# Altium PCB MARAL_LLC_V1.PcbDoc
Units mil, origin at the board's own origin, x right, y up, seen from the top; angles counter-clockwise.
Board outline 3780.71 x 2796.3 mil, 2 copper layers (Top Layer, Bottom Layer), stack 61.756 mil thick; 84 components, 54 nets, 207 pads, 12 vias.
Unrouted connection lines stored in the file: 4.
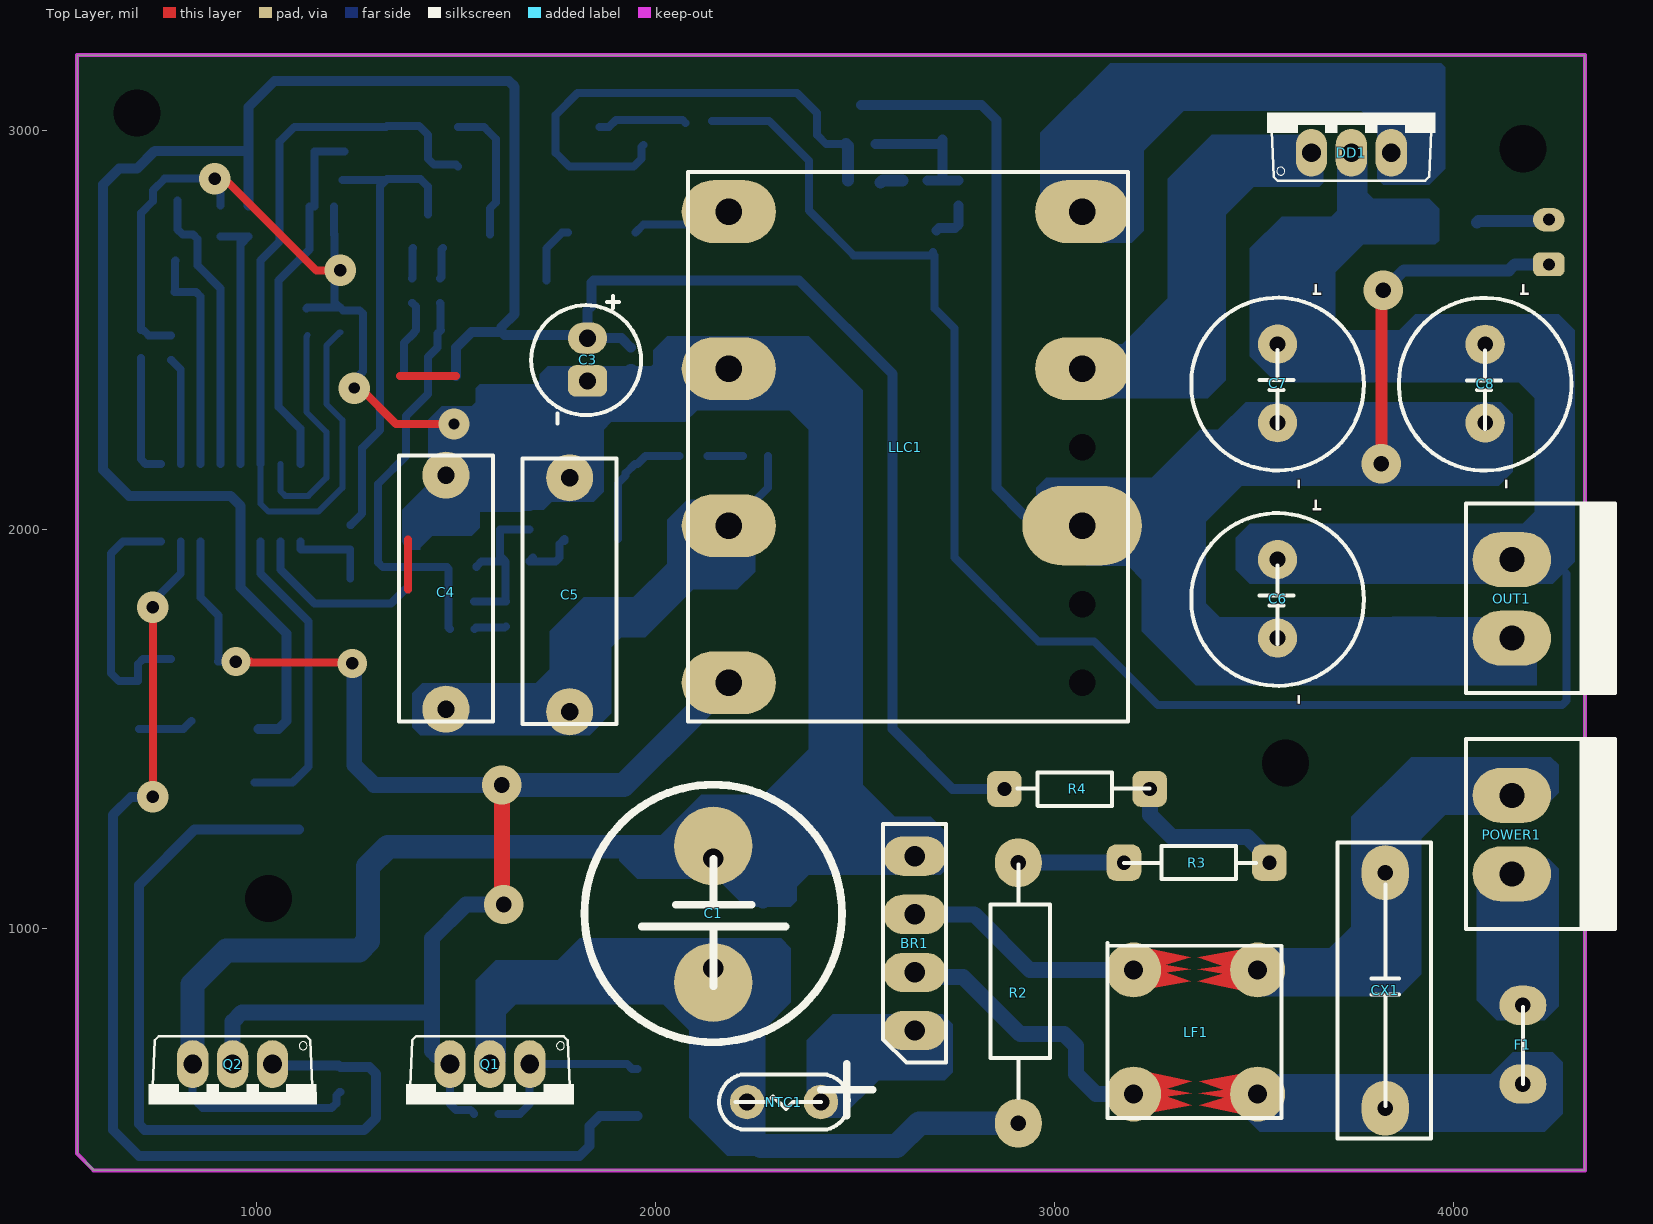
[diagram p0: Top Layer view]
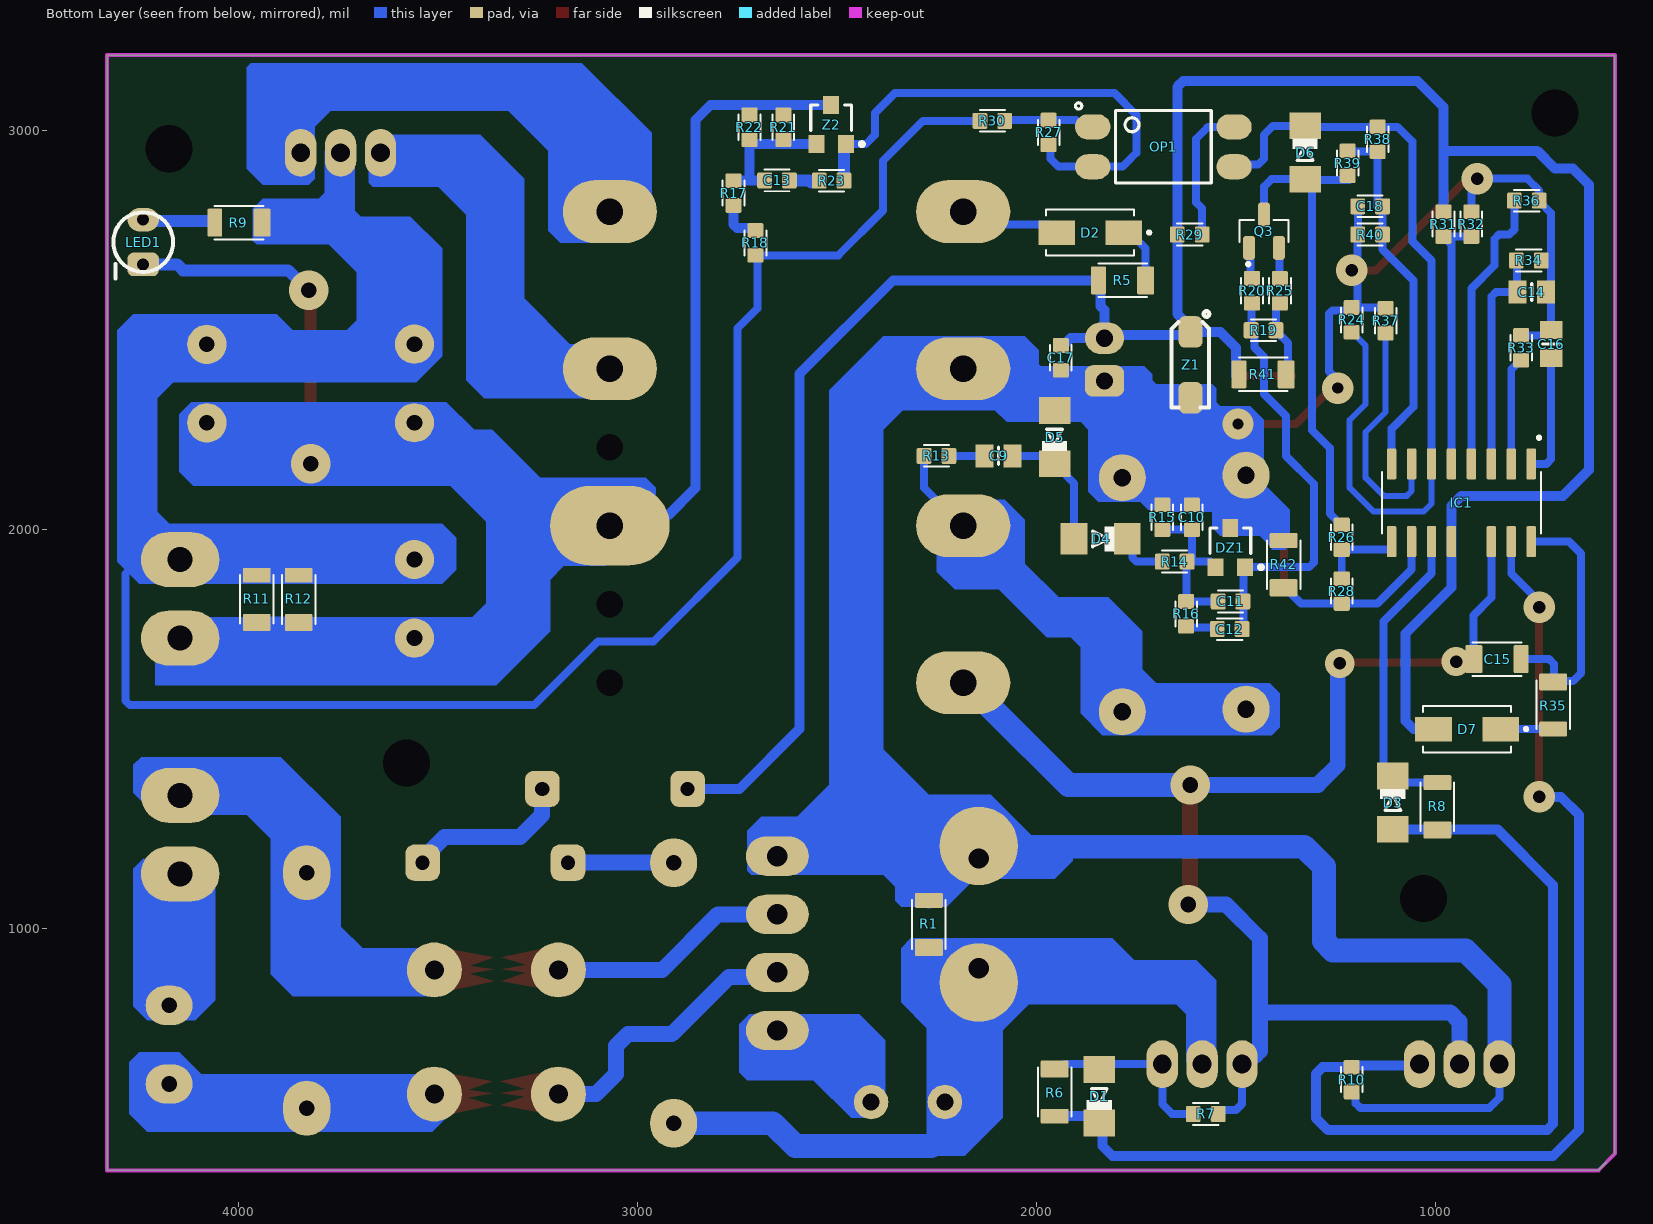
[diagram p1: Bottom Layer view, seen from below]
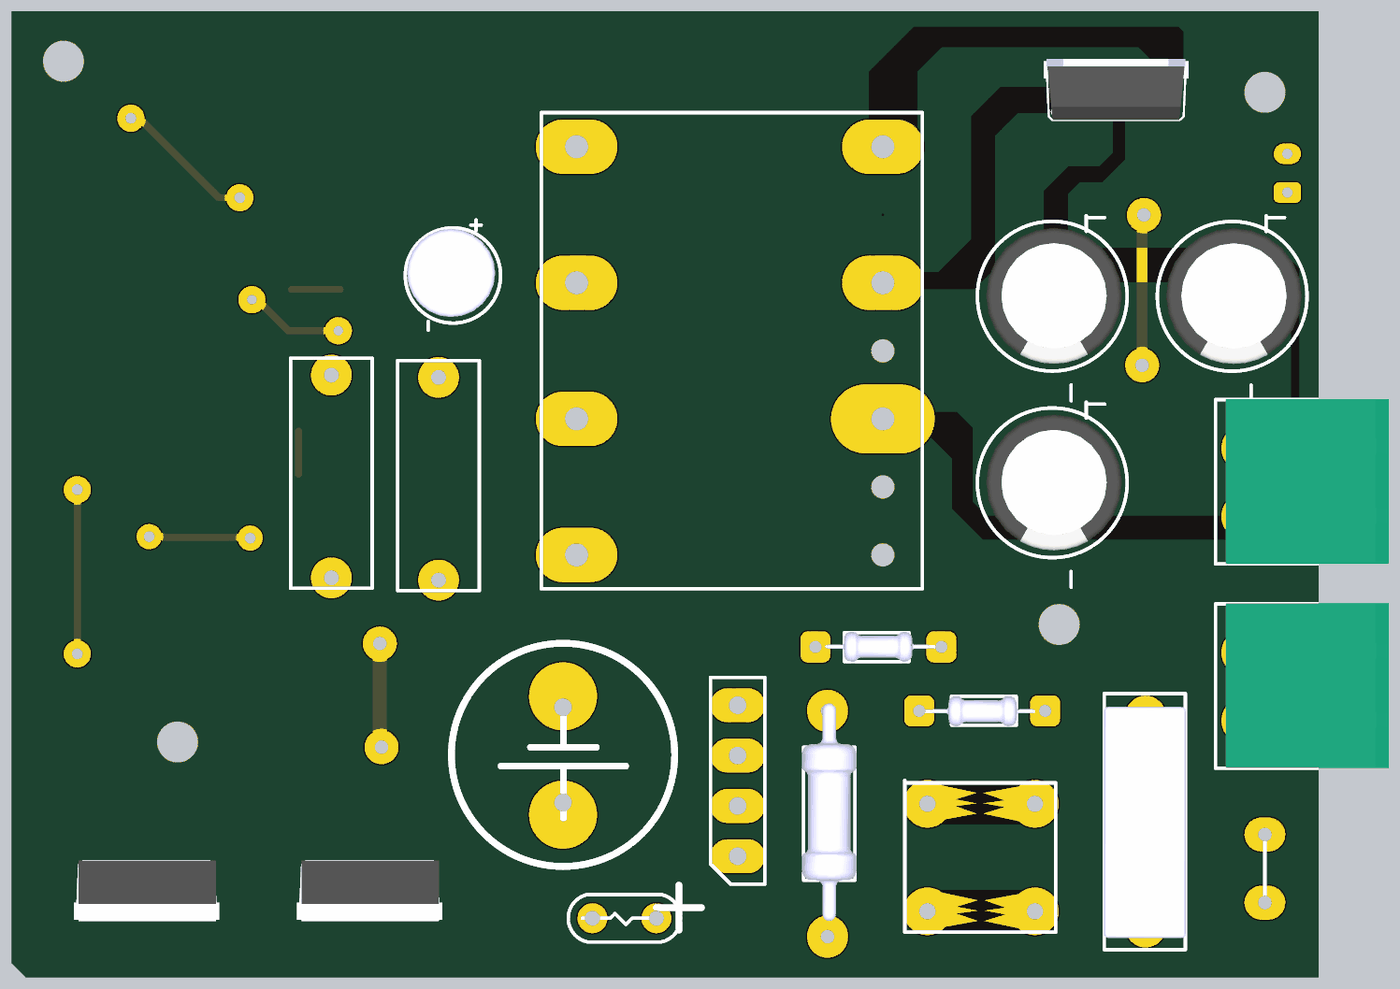
[diagram p2: 3D render of the assembled board from above, using the file's embedded part models]
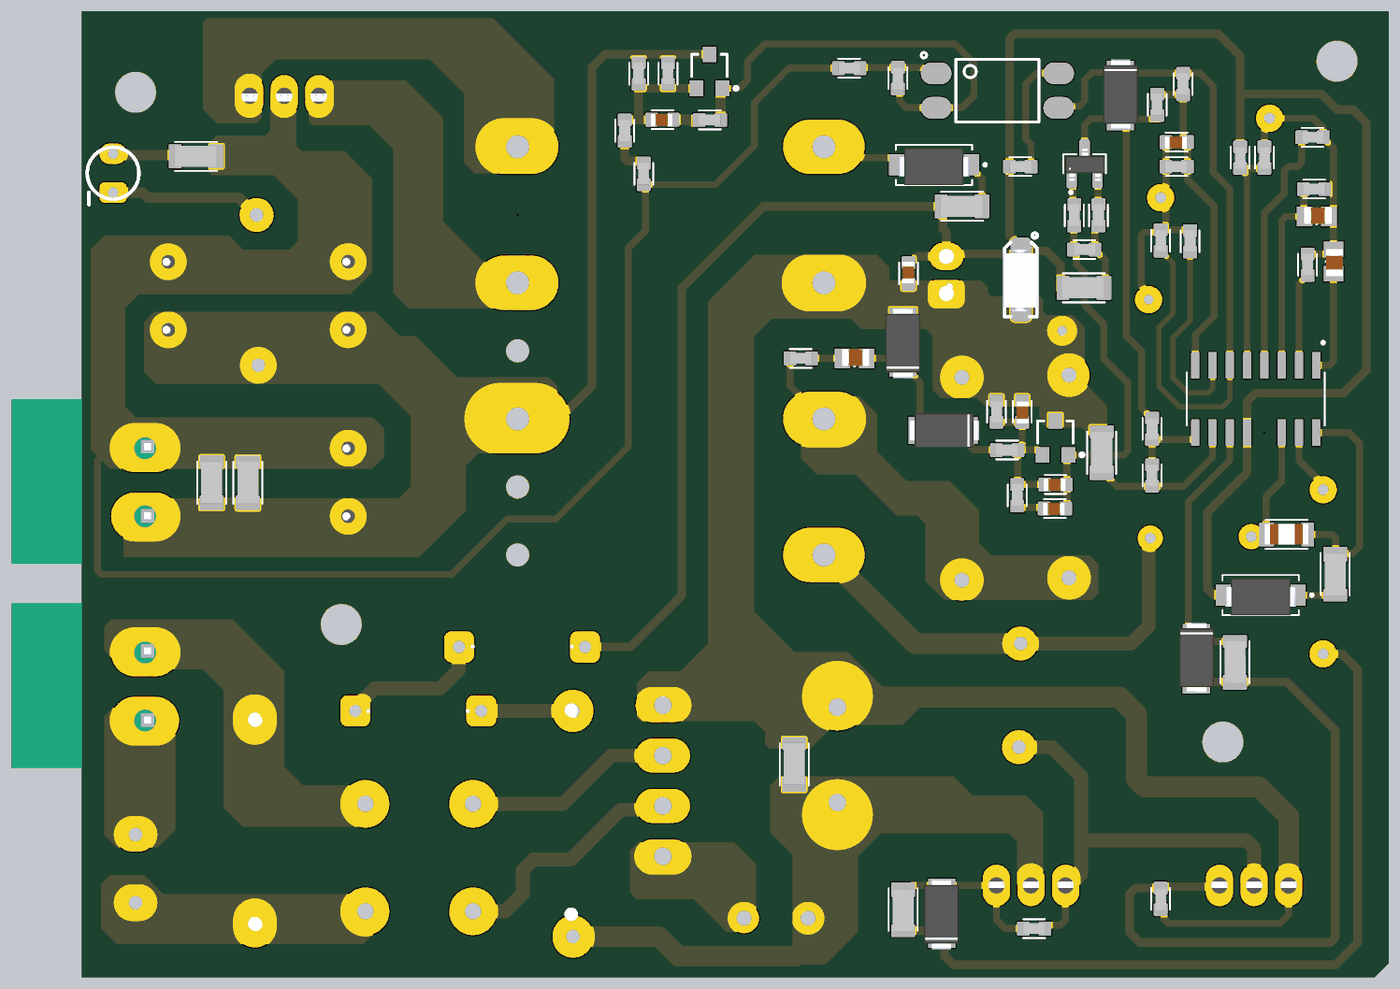
[diagram p3: 3D render of the assembled board from below, using the file's embedded part models]

## Layer stack, top to bottom
Top Solder: solder mask 1, SM-001, Dk 4
Top Layer: signal copper 1.378
Dielectric 1: core 59, Core-043, Dk 4.3
Bottom Layer: signal copper 1.378
Bottom Solder: solder mask 1, SM-001, Dk 4

## Board outline
550,435.55 550,3190 4330.71,3190 4330.71,393.7 591.85,393.7

## Design rules (kind name [scope] priority, off if disabled: settings)
Clearance [All] p1: gap=15 ignorepadtopadclearanceinfootprint=FALSE
ComponentClearance [All] p1: gap=0 collisioncheckmode=3 verticalgap=0 showdistances=FALSE
PolygonConnect [All] p1: connectstyle=Relief reliefconductorwidth=10 reliefentries=4 polygonreliefangle="90 Angle" airgapwidth=10
RoutingVias [All] p1: holewidth=28 width=50 viastyle="Through Hole" minholewidth=28 minwidth=50 maxholewidth=28 maxwidth=50
SolderMaskExpansion [All] p1: expansion=4 istentingtop=FALSE
Width [All] p1: maxlimit=196.85 minlimit=10 preferedwidth=10 minimp=50.000000 maximp=50.000000 favimp=50.000000
29 further rules are at their usual default settings.

## Classes and differential pairs
net class PP300V: +310 AC_L AC_N GND NetBR1_+ NetBR1_F NetBR1_N NetCX1_2
component class U_LLC: C3 C4 C5 C6 C7 C8 C9 C10 C11 C12 C13 C14 C15 C16 C17 C18 D1 D2 D3 D4 D5 D6 D7 DD1 DZ1 IC1 LED1 LLC1 OP1 Q1 Q2 Q3 R2 R3 R4 R5 R6 R7 R8 R9 R10 R11 R12 R13 R14 R15 R16 R17 R18 R19 R20 R21 R22 R23 R24 R25 R26 R27 R28 R29 R30 R31 R32 R33 R34 R35 R36 R37 R38 R39 R40 Z1 Z2
component class U_EMI_HV_Protect: BR1 C1 CX1 F1 LF1 NTC1 R1
component class Multi: OUT1 POWER1

## Components (designator, comment, footprint, x,y, rotation, side; value= is the part's Value field where it differs from the comment)
BR1 "KBL410" KBP206 2650,744.33 r90 top
C1 "100uF-400V" CAP-EL-P7MM 2145,1175.59 r270 top locked
C3 "100uF-25V" cap/330u/16v 1830,2372.93 r90 top
C4 "22nF/630V - MKT" CAP-POLY-0.47uF-400V 1475,2136.61 r270 top locked
C5 "22nF/630V - MKT" CAP-POLY-0.47uF-400V 1785,2130 r270 top locked
C6 "1000uF/35V" CAP-EL_P5MM 3559.61,1925.39 r270 top
C7 "1000uF/35V" CAP-EL_P5MM 3559.61,2465.39 r270 top
C8 "1000uF/35V" CAP-EL_P5MM 4080,2465 r270 top
C9 "220pF" CAP-0805 2059.01,2184.15 r0 bottom
C10 "10nF" CAP-0603 1610,2027.05 r270 bottom
C11 "68nF" CAP-0603 1517.95,1819.33 r0 bottom
C12 "NU" CAP-0603 1520,1750 r0 bottom
C13 "22nF" CAP-0603 2655,2875 r0 bottom
C14 "4.7uF" CAP-0805 722.16,2595 r0 bottom
C15 "100nF" CAP-1206 845,1670 r180 bottom
C16 "1uF" CAP-0805 710.85,2429.01 r90 bottom
C17 "100nF" CAP-0603 1940,2435 r90 bottom
C18 "2.2nF" CAP-0603 1167.8,2810 r0 bottom
CX1 "0.1uF/275V" CAP/0.22uF/275v/mkt 3830,1140 r270 top
D1 "4148" mini_melf 1845,585 r90 bottom
D2 "US1M" DIOD/1N4007/SMD 1780.75,2745 r0 bottom
D3 "4148" mini_melf 1105,1310 r270 bottom
D4 "4148" mini_melf 1845,1975 r0 bottom
D5 "4148" mini_melf 1956.92,2237.55 r90 bottom
D6 "4148" mini_melf 1325,2940 r270 bottom
D7 "DIOD/RECTIFIERS" DIOD/1N4007/SMD 835.75,1500 r0 bottom
DD1 "MBR10150" TO220AB 3745,2945 r0 top
DZ1 "TL431" TL431 1550,1905 r180 bottom
F1 "3A" FUZE_GLASS_ISTADE 4175,806.85 r270 top
IC1 "NCP1396" TL494_SMD 949.98,2060.77 r270 bottom
LED1 "LED-1COLER" led/3MM/DIP 4240,2665 r90 bottom
LF1 "" emi_chok_yd 3510,585 r180 top
LLC1 "EE33" EE33 2184.17,2797.4 r90 top locked
NTC1 "5D7" NTC_XD_7 2415,565 r180 top
OP1 "pc817" pc817 1674.32,2954.52 r180 bottom
OUT1 "CONECTOR/FONIX/2PIN" CONECTOR/FONIX/2PIN 4150,1731.03 r90 top
POWER1 "CONECTOR/FONIX/2PIN" CONECTOR/FONIX/2PIN 4150,1140 r90 top
Q1 "SVF12N650" TO-220 1584.96,659.96 r180 top
Q2 "SVF12N650" TO-220 939.96,659.96 r180 top
Q3 "" SOT23 1467.4,2706.3 r270 bottom
R1 "1M" RES/1206 2265,1010 r90 bottom
R2 "33K" RES/1W 2910,1165 r270 top
R3 "33K" RES/0.25W 3539.48,1165 r180 top
R4 "33K" RES/0.25W 2875,1350 r0 top
R5 "10R" RES/1206 1784.51,2630.14 r0 bottom
R6 "10R" RES/1206 1960,590 r270 bottom
R7 "10K" RES/0603 1580,535 r0 bottom
R8 "33R" RES/1206 990,1305.29 r90 bottom
R9 "10K" RES/1206 4000,2775 r0 bottom
R10 "10K" RES/0603 1210,625 r90 bottom
R11 "2.2K" RES/1206 3950,1825.29 r90 bottom
R12 "2.2K" RES/1206 3845,1825 r90 bottom
R13 "680R" RES/0603 2255,2185 r0 bottom
R14 "100K" RES/0603 1650,1920 r180 bottom
R15 "5.1K" RES/0603 1685,2035 r90 bottom
R16 "NU" RES/0603 1625,1785 r270 bottom
R17 "220" RES/0603 2760,2840 r270 bottom
R18 "18K" RES/0603 2705,2715 r270 bottom
R19 "1K" RES/0603 1435,2500 r0 bottom
R20 "10K" RES/0603 1460,2595 r270 bottom
R21 "2.2K" RES/0603 2635,3005 r270 bottom
R22 "39K" RES/0603 2720,3005 r270 bottom
R23 "1K" RES/0603 2510,2875 r180 bottom
R24 "2.2K" RES/0603 1210,2530 r90 bottom
R25 "512R" RES/0603 1390,2595 r270 bottom
R26 "10K" RES/0603 1235,1985 r90 bottom
R27 "10K" RES/0603 1970,3000 r90 bottom
R28 "6.2K" RES/0603 1235,1842.2 r270 bottom
R29 "100R" RES/0603 1620,2740 r0 bottom
R30 "1.5K" RES/0603 2115,3025 r0 bottom
R31 "10K" RES/0603 980,2770 r90 bottom
R32 "2.2K" RES/0603 910,2770 r90 bottom
R33 "3.9K" RES/0603 785,2452.2 r270 bottom
R34 "150K" RES/0603 770,2675 r0 bottom
R35 "10R" RES/1206 710.14,1560.49 r270 bottom
R36 "10K" RES/0603 775,2825 r0 bottom
R37 "10K" RES/0603 1125,2520 r270 bottom
R38 "50R" RES/0603 1145,2975 r270 bottom
R39 "0R/NU" RES/0603 1220,2915 r270 bottom
R40 "1.5K" RES/0603 1160,2740 r180 bottom
R41 "0R" RES/1206 1432.18,2394.42 r0 bottom (schematic designator R5)
R42 "0R" RES/1206 1375.58,1912.18 r90 bottom (schematic designator R5)
Z1 "18V" DIOD/RS1J 1610,2410 r270 bottom
Z2 "TL431" TL431 2550.51,2965.76 r180 bottom

## Footprints (in the part's own frame and the unit in brackets; to place one, negate y for a bottom-side part, rotate by r counter-clockwise, add the part's x,y. Pads: shape width x height; smd on the part's side, far side on the other; paste and mask are expansions set on the pad)
CAP-0603 [mm]
  rrect20% 0.94x1.02 smd: 1(-0.893,-0.017) 2(0.687,-0.017)
  silkscreen extent -0.9,-0.71 0.7,0.67, body extent -0.84,-0.44 0.76,0.46, height 0.77
CAP-0805 [mm]
  rect 1.15x1.45 smd: 1(0.025,-0.022) 2(1.825,-0.022)
  silkscreen extent 0.93,-0.57 0.93,0.53, body extent -0.17,-0.71 1.84,0.54, height 0.94
CAP-1206 [mm]
  rrect14% 1.09x1.77 smd: 1(-1.488,0.139)
  rrect14% 0.94x1.77 smd: 2(1.517,0.139)
  silkscreen extent -1.57,-0.93 1.53,1.2, body extent -1.63,-0.6 1.57,0.9, height 1.6
CAP-EL-P7MM [mm]
  round 5 hole 1.3 copper offset 0.9,0: +(7,0)
  round 5 hole 1.3 copper offset -0.8,0: -(0,0)
  silkscreen extent -4.7,-8.2 16.38,10.16
CAP-EL_P5MM [mm]
  round 2.5 hole 1: +(0.01,0.01) -(5.01,0.01)
  silkscreen extent -2.95,-5.49 8.05,5.51, body extent -2.48,-4.86 7.52,5.14, height 16
CAP-POLY-0.47uF-400V [mm]
  round 3 hole 1.1: 1(0,0) 2(14.9,0)
  silkscreen extent -1.24,-3 15.67,3
CAP/0.22uF/275v/mkt [mm]
  oval 3.5x3 hole 1: 1(0,0) 2(15,0)
  silkscreen extent -1.91,-3.05 16.91,2.92, body extent -0.94,-3.05 16.06,2.95, height 11.5
cap/330u/16v [mm]
  oval 2x2.5 hole 1.1: +(2.72,0)
  rrect50% 2x2.5 hole 1.1: -(0,0)
  silkscreen extent -2.7,-3.41 5.4,3.59, body extent -1.74,-3.02 4.76,3.48, height 11
CONECTOR/FONIX/2PIN [mm]
  oval 3.5x5 hole 1.6: 1(-0.073,0.063) 2(4.927,0.063)
  silkscreen extent -3.58,-6.5 8.5,3, body extent -3.54,-9.75 8.54,2.25, height 3
DIOD/1N4007/SMD [mm]
  rect 2.33x1.56 smd: A(4.299,0) K(0.019,0)
  silkscreen extent -1.7,-1.48 4.96,1.48, body extent -0.44,-1.24 4.76,1.49, height 2.6
DIOD/RS1J [mil]
  rrect50% 78.74x60 smd: A(79.25,-4.16) K(-85.75,-4.16)
  silkscreen extent -138,-52 104,43, body extent -91,-57 90,46, height 83
EE33 [mm]
  oval 4x6 hole 1.7: 1(0,0) 2(-10,0) 3(-20,0) 4(-30,0) 5(0,-22.5) 7(-10,-22.5)
  round 0 all layers, no hole: 6(-5,-22.5)
  round 0 hole 1.7: 8(-15,-22.5) 10(-25,-22.5) 11(-30,-22.5)
  oval 5.08x7.62 hole 1.7: 9(-20,-22.5)
  silkscreen extent -32.49,-25.41 2.51,2.59
emi_chok_yd [mm]
  round 3.5 hole 1.2: 1(0,0) 2(7.9,0) 3(0,-7.9) 4(7.9,-7.9)
  Top Layer region: 6.6,-8.366 6.6,-7.625 4.266,-7.938
  Top Layer region: 4.269,-8.707 6.568,-8.001 8.034,-9.506
  Top Layer region: 4.273,-7.183 7.969,-6.513 6.616,-7.995
  Top Layer region: 1.475,-7.521 1.475,-8.261 3.809,-7.948
  Top Layer region: 3.807,-7.179 1.508,-7.885 0.041,-6.381
  Top Layer region: 3.802,-8.703 0.106,-9.373 1.46,-7.892
  Top Layer region: 6.526,-0.477 6.526,0.264 4.191,-0.049
  Top Layer region: 4.194,-0.818 6.493,-0.112 7.959,-1.617
  Top Layer region: 4.199,0.706 7.894,1.376 6.541,-0.106
  Top Layer region: 1.4,0.369 1.4,-0.372 3.734,-0.059
  Top Layer region: 3.732,0.71 1.433,0.004 -0.034,1.509
  Top Layer region: 3.727,-0.814 0.031,-1.484 1.385,-0.002
  silkscreen extent -1.52,-9.62 9.57,1.53
FUZE_GLASS_ISTADE [mm]
  oval 2.5x3 hole 1: 1(-0.011,0) 2(5,0)
  silkscreen extent 0.1,0 5,0
KBP206 [mm]
  oval 2.5x4 hole 1.3: +(0,0) -(11.1,0) F(3.7,0) N(7.4,0)
  silkscreen extent -2.05,-2 13.15,2
led/3MM/DIP [mm]
  oval 1.5x2 hole 0.762: A(2.85,0)
  rrect50% 1.5x2 hole 0.762: K(0,0)
  silkscreen extent -0.89,-1.9 3.32,1.9
mini_melf [mm]
  rect 1.7x2 smd: A(1.557,-0.049) K(-1.843,-0.049)
  silkscreen extent -1.01,-0.84 0.36,0.74, body extent -2.79,-1.31 2.35,1.25, height 2.5
NTC_XD_7 [mm]
  round 2.2 hole 1.1: 1(0,0) 2(4.7,0)
  silkscreen extent -1.78,-1.74 6.48,1.74
pc817 [mm]
  oval 2.25x1.6 smd: 1(-4.699,1.409) 2(-4.699,-1.131) 3(4.301,-1.131) 4(4.301,1.409)
  silkscreen extent -5.8,-2.16 2.85,2.94
RES/0.25W [mm]
  rrect50% 2.2x2.3 hole 0.9: 1(0,0) 2(9.258,0)
  silkscreen extent 0.85,-1.07 9.26,1.05, body extent 0.81,-1.08 8.41,1.12, height 2.1
RES/1W [mm]
  oval 3.1x3 hole 1: 1(0,0) 2(16.591,0)
  silkscreen extent 0.11,-1.76 15,2.02, body extent -0.56,-1.87 15.44,2.13, height 5
RES/0603 [mm]
  rrect20% 0.94x1.02 smd: 1(-0.889,0) 2(0.691,0)
  silkscreen extent -0.9,-0.69 0.7,0.69, body extent -0.93,-0.41 0.67,0.39, height 0.43
RES/1206 [mm]
  rrect14% 1.09x1.77 smd: 1(-1.469,0.131)
  rrect14% 0.94x1.77 smd: 2(1.536,0.131)
  silkscreen extent -1.55,-0.93 1.55,1.2, body extent -1.51,-0.65 1.59,0.9, height 0.55
SOT23 [mil]
  rrect50% 60x30 smd: 1(-0.24,0) 2(-83.7,37.4) 3(-0.24,74.8)
  silkscreen extent -70,-24 45,99, body extent -86,-19 7,96, height 44
TL431 [mil]
  rect 40x45 smd: A(35.51,99.24) C(72.91,0.81) REF(-1.9,0.81)
  silkscreen extent -16,-4 117,99
TL494_SMD [mm]
  rrect25% 1.97x0.6 smd: 1(-2.644,4.826) 2(-2.644,3.556) 3(-2.644,2.286) 4(-2.644,1.016) 5(-2.644,-0.254) 6(-2.644,-1.524) 7(-2.644,-2.794) 8(-2.644,-4.064) 9(2.306,-4.064) 10(2.306,-2.794) 11(2.306,-1.524) 12(2.306,-0.254) 14(2.306,2.286) 15(2.306,3.556) 16(2.306,4.826)
  rrect25% 0x0 smd: 13(2.306,1.016)
  silkscreen extent -4.41,-4.68 1.78,5.45
TO220AB [mm]
  oval 2x3.048 hole 1.2: 1(-2.54,0) 2(0,0) 3(2.54,0)
  silkscreen extent -5.34,-1.78 5.33,2.54, body extent -5.12,-1.78 5.08,2.72, height 20.58
TO-220 [mm]
  oval 2x3.048 hole 1.2: 1(-2.541,-0.001) 2(-0.001,-0.001) 3(2.539,-0.001)
  silkscreen extent -5.35,-1.78 5.33,2.54, body extent -5.11,-1.83 4.99,2.62, height 19.84

## Part data
BR1: library part "BRIDGE RECTIFIERS"
C1 C3 C6 C7 C8: library part cap-electrolit
C4 C5: library part cap-poly
C9 C10 C11 C12 C13 C14 C15 C16 C17 C18: library part cap_smd
CX1: library part cap-mkt
D1 D2 D3 D4 D5 D6: library part DIOD/RECTIFIERS
DD1: library part DIOD_double
F1: library part fuze
LF1: library part emi_chok_yd
LLC1: library part TRANS_RT03_LLC
NTC1: library part NTC
Q1 Q2: library part MOSFET_N_CH
Q3: library part PNP
R1 R5 R6 R7 R8 R9 R10 R11 R12 R13 R14 R15 R16 R17 R18 R19 R20 R21 R22 R23 R24 R25 R26 R27 R28 R29 R30 R31 R32 R33 R34 R35 R36 R37 R38 R39 R40 R41 R42: library part RES/SMD
R2 R3 R4: library part RES/<1W
Z1: library part zener-0.5w

## Free pads (board coordinates)
  round 0 hole 118.11: 2(700,3045) 2(1030,1075) 2(3580,1415) 2(4175,2955)

## Via types
v1: diameter 98.43, hole 39.37, Top Layer to Bottom Layer, 4 vias
v2: diameter 78.74, hole 31.5, Top Layer to Bottom Layer, 4 vias
v3: diameter 78.74, hole 28, Top Layer to Bottom Layer, 2 vias
v4: diameter 72.83, hole 31.5, Top Layer to Bottom Layer, 2 vias

## Nets (pads, with @x,y where several pads share a name; then routed paths per layer and width w, separated by ;. In a path a pad name is that pad's centre, name@x,y a point inside that pad or via, vN(x,y) a via of type N, cw(c..) or ccw(c..) an arc to the next point about the centre after c; other vN are vias at no path point)
+24: C6.+ C7.+ C8.+ DD1.2 OUT1.2 R9.1 R11.2 R12.2 R18.2 R30.2 | length 6376.3
  Bottom Layer w20: R30.2 2285,3025 2385,2925 2385,2800 2497.2,2687.8 2694.92,2687.8 2696.5,2689.37 R18.2@2696.5,2696.3 ; R18.2@2700,2687.8 2700,2555 2750,2505 2750,1930 2960,1720 3100,1720 3260,1560 4273.28,1560 4285,1571.72 4285,1889.29 4264.29,1910 4162.52,1910 OUT1.2 ; 3745,2785.15 3760.29,2769.86 R9.1
  Bottom Layer w60: C6.+@3546.57,1923.43 4145.95,1923.43 OUT1.2 4156,1925 4191.94,1960.94 4191.94,1969.41 4255,2032.48 4255,2429.46 4219.85,2464.61 C8.+ 4080.2,2464.8 3560.2,2464.8 C7.+ 3560,2685 3625,2750 3709.85,2750 3745,2785.15 DD1.2@3745,2930
+310: C1.+ NTC1.2 Q1.2 R1.1 R2.2 | length 2126.2
  Bottom Layer w40: C1.+@2109.57,864.57 2140,895 C1.+ 2150.42,894.58 2241.44,894.58 2255.3,908.45 2255.3,950.72 2256.76,952.18 R1.1
  Bottom Layer w60: Q1.2 1585,810 1639.57,864.57 C1.+@2109.57,864.57 ; C1.+@2140,895 2140,588.43 2154.51,573.92 2221.04,573.92 NTC1.2 2225.53,560.57 2225.53,494.47 2265,455 2605,455 2661.81,511.81 R2.2
AC_L: F1.1 POWER1.1 | length 291
  Bottom Layer w60: POWER1.1 4147.53,878.48 4170,856 F1.1@4170,855.45
AC_N: CX1.1 LF1.3 POWER1.2 | length 989.2
  Bottom Layer w60: LF1.3 3791.02,896.02 3840,945 3840,1140 3841.12,1141.12 3841.12,1221.12 3965,1345 4136.49,1345 POWER1.2
FB: D6.K IC1.6 OP1.3 R24.1 R38.1 | length 2135.6
  Bottom Layer w15: IC1.6 1010,2065 1030,2045 1155,2045 1215,2105 1215,2275 1175,2315 1175,2461.57 R24.1@1208.43,2495 ; R24.1@1204.25,2489.25 R24.1
  Bottom Layer w20: IC1.6 1010,2675 1057.8,2722.8 1057.8,2972.8 1095,3010 R38.1 1324.37,3010 D6.K 1407.55,3012.55 1430,2990.1 1430,2930 1445,2915 1500,2915 OP1.3
GATE_H: D1.K IC1.15 R6.2 | length 2989.6
  Top Layer w20: v2(740,1330) v2(740,1805)
  Bottom Layer w20: v2(740,1805) 740,1820 810,1890 IC1.15
  Bottom Layer w25: v2(740,1330) 685,1330 640,1285 640,495 705,430 1810,430 1835,455 1835,504.37 D1.K 1860.15,529.51 R6.2
GATE_L: D3.K IC1.11 R8.2 | length 765.4
  Bottom Layer w20: R8.2 1090.14,1365.77 D3.K 1130,1405.63 1130,1770 1010,1890 IC1.11
GND: BR1.- C1.- C3.- C4.1 C5.1 C10.1 C14.1 C16.2 C17.1 C18.2 D5.A DZ1.A IC1.10 LLC1.2 Q2.3 R1.2 R10.1 R15.2 R24.2 R28.2 R32.2 R33.1 R34.1 R36.1 R37.1 R40.1 R42.1 R42.2 Z1.A | length 8690.8
  Top Layer w20: v2(895,2880) 920,2880 1150,2650 v2(1210,2650) ; v3(1245,2355) 1260,2355 1350,2265 v3(1495,2265) ; 1380,1850 1380,1975
  Bottom Layer w20: R33.1 729.57,2487.2 715.91,2500.87 C16.2 710,2793.43 740,2823.43 R36.1 740,2850.28 769.72,2880 v2(895,2880) 910,2865 R32.2@910,2812.2 ; Q2.3 840,575 855.03,559.97 865,550 1188.28,550 1200,561.72 1200,581.5 1208.5,590 R10.1 ; IC1.10 1060,1900 1145,1815 R28.2 1337.22,1815 1372.22,1850 R42.1@1380,1850 ; R37.1 1127.2,2557.2 R24.2@1208.43,2557.2 ; R40.1@1194.84,2740 C18.2 ; v2@1195,2650 1195,2570.63 R24.2@1208.43,2557.2 ; v2@1195,2673.12 R40.1 ; v3(1245,2355) 1245,2375 1266.72,2396.72 1266.72,2541.57 1258.28,2550 1217.2,2550 R24.2 R24.2@1208.43,2557.2
  Bottom Layer w30: R42.2@1380,1975 1380,2041.61 C4.1 ; C4.1@1475,2110.07 1514.49,2070.57 DZ1.A ; 1610.67,2128.98 C10.1 R15.2
  Bottom Layer w40: D5.A@1939.41,2330.75 C17.1@1939.41,2394.76 ; R1.2 2270.14,1165.14
  Bottom Layer w60: Q2.3 840,860 925,945 1256.57,945 1280,968.43 1280,1155 1330,1205 2115.59,1205 C1.- 2161.93,1192.52 2450,1192.52 ; C4.1@1475,2110.07 C4.1 ; v3(1495,2265) 1500,2260 1500,2197.39 1493.77,2191.16 1493.77,2155.39 C4.1 ; 1610.67,2128.98 1615,2133.31 ; Z1.A 1785,2330.75 ; D5.A@1939.41,2330.75 1939.41,2308.54 1917.2,2330.75 1785,2330.75 ; D5.A@1962.56,2312.32 2039.97,2312.32 2131.35,2403.7 2389.85,2403.7 2425,2368.55 2425,1217.52 2450,1192.52 ; 2258.22,1177.07 2270.14,1165.14 ; BR1.- 2638.82,1192.52 2450,1192.52 ; C4.1 1478.31,2133.31 1615,2133.31 ; 1615,2133.31 1781.69,2133.31 C5.1 1785,2330.75
GND_S: C6.- C7.- C8.- LED1.K LLC1.6 LLC1.9 OUT1.1 R11.1 R12.1 R21.1 R22.1 Z2.A | length 4899
  Top Layer w30: v1(3820,2165) 3820,2595 v1(3825,2600)
  Bottom Layer w25: Z2.A 2817.43,3065 2855,3027.43 2855,2105 2925,2035 3290,2035 ; C7.-@3560,2267.76 3820,2267.76 ; C7.- 3554.99,2263.14 3488.14,2263.14 3290,2065 3290,2035 ; v1(3820,2165) 3820,2267.76 ; C8.- 3820,2267.76 ; OUT1.1 4145.95,1726.57 3955,1726.57 3546.57,1726.57 3545,1725 3365,1725 3290,1800 3290,2035
  Bottom Layer w30: v1(3825,2600) 3826.79,2600 3876.79,2650 4140,2650 4155,2665 LED1.K ; R12.1 3850.29,1767.32 R11.1@3955,1767.32 ; 3955,1726.57 R11.1@3955,1767.32 ; R11.1 R11.1@3955,1767.32
NetBR1_+: BR1.+ NTC1.1 | length 388.4
  Bottom Layer w40: NTC1.1 2415,700 2459.33,744.33 BR1.+
NetBR1_F: BR1.F LF1.2 | length 716.3
  Bottom Layer w40: BR1.F 2661.18,878.82 2771.18,878.82 2915,735 3025,735 3055,705 3055,635 3105,585 LF1.2
NetBR1_N: BR1.N LF1.4 | length 606.8
  Bottom Layer w40: BR1.N 2799.33,1035.67 2938.98,896.02 LF1.4
NetC4_2: C4.2 C5.2 LLC1.3 R13.2 | length 1225.5
  Bottom Layer w20: LLC1.3 2187.08,2010 2282.2,2105.12 R13.2
  Bottom Layer w60: C4.2 1478.31,1546.69 1781.69,1546.69 C5.2 1785,1559.11 1830,1604.11 1830,1754.85 1865.15,1790 1960.61,1790 2103.39,1932.78 2103.39,1942.21 2171.18,2010 LLC1.3
NetC9_1: C9.1 D4.A D5.K | length 325
  Bottom Layer w20: D4.A 1906.31,2116.31 1925.63,2135.63 1925.63,2141.54 1949.09,2165 D5.K 1975,2185 C9.1
NetC9_2: C9.2 R13.1 | length 89.1
  Bottom Layer w20: C9.2 R13.1
NetC10_2: C10.2 C11.2 DZ1.REF R14.2 R15.1 R16.1 | length 418.5
  Bottom Layer w20: C11.2 R16.1 1623.9,1821.1 1623.9,1918.9 R14.2 ; DZ1.REF 1551.9,1908.31 1563.58,1920 R14.2 ; R15.1 C10.2 1610.67,1933.7 1622.8,1921.57 R14.2
NetC11_1: C11.1 C12.1 DZ1.C R19.2 R20.2 | length 1051.6
  Bottom Layer w20: R20.2 1461.1,2566.69 1461.1,2501.1 R19.2 1453.7,2491.5 1453.7,2456.5 1430,2432.8 1430,2340 1375,2285 1375,2185 1305,2115 1305,1917.53 1316.72,1905.81 DZ1.C 1480.97,1901.94 1480.97,1820 1480.97,1754.54 C12.1
NetC12_2: C12.2 R16.2 | length 80.9
  Bottom Layer w20: C12.2 1550.61,1754.23 1621.44,1754.23 R16.2
NetC13_1: C13.1 R23.1 | length 57.2
  Bottom Layer w30: 2565,2870 2570.67,2875.67 C13.1
NetC13_2: C13.2 R17.1 R21.2 R22.2 Z2.REF | length 333.7
  Bottom Layer w25: Z2.REF R22.2@2705,2966.57 ; C13.2 2682.38,2875.33 2721.02,2875.33 ; R22.2 2720,2876.36 2721.02,2875.33 ; R17.1 2759.67,2875.33 2721.02,2875.33
NetC14_2: C14.2 IC1.3 R34.2 | length 570.6
  Bottom Layer w20: R34.2 795.61,2673.4 795.61,2597.45 C14.2 848.28,2595.85 860,2584.14 IC1.3
NetC15_1: C15.1 IC1.14 LLC1.4 Q1.3 Q2.2 R7.1 | length 3591.3
  Top Layer w20: 985,1670 987.5,1667.5 1237.5,1667.5 v4(1240,1665)
  Top Layer w40: v1(1615,1360) 1615,1065 v1(1620,1060)
  Bottom Layer w20: IC1.14 860,1830 905,1785 905,1670.57 903.58,1669.15 v4(948.15,1669.15) ; Q1.3 1485,560 1499.92,545.08 1536.5,545.08 1545,536.57 R7.1
  Bottom Layer w40: Q2.2 940,766.57 963.43,790 1440,790 ; v4@1245,1660 1245,1410 1295,1360 v1(1615,1360) ; Q1.3 1485,662.1 1467.1,680 1453.43,680 1440,693.43 1440,790 ; v1(1620,1060) 1525,1060 1440,975 1440,790
  Bottom Layer w60: v4(1240,1665) v4@1245,1660 ; v1(1615,1360) 1920.29,1360 2102.59,1542.3 2176.59,1616.3 LLC1.4
NetC15_2: C15.2 IC1.16 R35.1 | length 644.6
  Bottom Layer w20: IC1.16 665,1970 635,1940 635,1640 655,1620 703.31,1620 703.31,1663.77 715.02,1675.49 C15.2
NetC16_1: C16.1 IC1.1 | length 308.3
  Bottom Layer w20: C16.1 710,2176.6 721.72,2164.88 IC1.1
NetC18_1: C18.1 IC1.8 R38.2 R39.1 R40.2 | length 912.7
  Bottom Layer w20: 1106.46,2256.46 1055,2307.93 1055,2625 1132.64,2702.64 1132.64,2740 C18.1 ; 1106.81,2256.46 1110,2253.28 IC1.8 ; C18.1@1145,2810.67 R38.2 R39.1@1220,2947.8
NetCX1_2: CX1.2 F1.2 LF1.1 | length 762.8
  Bottom Layer w60: LF1.1 3531.05,584.99 3566.59,549.45 CX1.2 4134.85,549.45 4170,584.6 F1.2@4170,658.15
NetD1_A: D1.A Q1.1 R6.1 R7.2 | length 463.1
  Bottom Layer w20: R7.2 1660,535 1685,560 Q1.1 1929.29,660 1941.47,647.82 R6.1
NetD2_A: D2.A LLC1.1 | length 255.9
  Bottom Layer w20: D2.A 1970.71,2765.71 2075.91,2765.71 2107.6,2797.4 LLC1.1
NetD2_K: D2.K R5.1 | length 151.6
  Bottom Layer w20: R5.1 1726.69,2705.35 1766.34,2745 D2.K
NetD3_A: D3.A Q2.1 R8.1 R10.2 | length 2052.8
  Bottom Layer w25: Q2.1 1043.9,656.1 1206.1,656.1 R10.2 1282.8,652.2 1289.97,645.03 1300,635 1300,525 1270,495 719.64,495 705,509.64 705,1108.69 845,1248.69 D3.A
NetD4_K: D4.K R14.1 | length 150.7
  Bottom Layer w20: R14.1@1693.5,1930.08 1685,1921.57 R14.1 1750,1920 1760,1930 1760,1964.47 D4.K D4.K@1772.45,1971.01
NetD6_A: D6.A Q3.2 R26.2 R39.2 | length 1198.8
  Bottom Layer w20: R39.2@1215,2877.2 1325.43,2877.2 D6.A ; R26.2 1236.57,2012.2 1265,2040.63 1265,2205 1310,2250 1310,2320 1310,2861.77 D6.A ; Q3.2 1430,2860 1411.31,2878.69 D6.A
NetD7_K: D7.K R35.2 | length 139.8
  Bottom Layer w20: R35.2 816.5,1500 D7.K@836.5,1520
NetDD1_1: DD1.1 LLC1.7 | length 1010.1
  Bottom Layer w60: LLC1.7 3278.7,2403.7 3375,2500 3375,2870.64 3434.36,2930 DD1.1@3645,2930
NetDD1_3: DD1.3 LLC1.5 | length 1131.2
  Bottom Layer w60: LLC1.5 3070,2940 3229.61,3099.61 3813.44,3099.61 3848.59,3064.46 DD1.3@3848.59,2935.07
NetIC1_2: IC1.2 R33.2 | length 271.4
  Bottom Layer w20: R33.2 786.57,2425 810,2401.57 IC1.2
NetIC1_4: IC1.4 R36.2 | length 719.9
  Bottom Layer w20: R36.2 802.2,2752.8 815,2740 840.78,2740 852.5,2728.28 852.5,2662.5 910,2605 IC1.4
NetIC1_5: IC1.5 R31.1 R32.1 | length 664.3
  Bottom Layer w20: R32.1 R31.1 978.43,2735 969.92,2726.5 969.92,2724.7 960,2714.78 ; IC1.5 R31.1@960,2729.78
NetIC1_7: IC1.7 R37.2 | length 586.6
  Bottom Layer w15: IC1.7 1060,2096.72 1071.72,2085 1130,2085 1175,2130 1175,2245 1125,2295 1125,2484.41 R37.2@1128.39,2487.8
NetIC1_13: IC1.13
NetLED1_A: LED1.A R9.2 | length 182.7
  Bottom Layer w30: R9.2 4060.49,2770.03 4063.99,2773.53 4236.33,2773.53 LED1.A
NetLLC1_8: LLC1.8
NetLLC1_10: LLC1.10
NetLLC1_11: LLC1.11
NetOP1_1: OP1.1 R27.2 R30.1 | length 225.8
  Bottom Layer w20: OP1.1 1883.76,3010 1900.96,3027.2 R27.2 2067.8,3027.2 R30.1@2075,3020
NetOP1_2: OP1.2 R23.2 R27.1 Z2.C | length 1299.4
  Bottom Layer w20: R27.1 1965,2960 1965,2930 1945,2910 OP1.2 1785,2910 1775.03,2919.97 1750,2945 1750,3040 1805,3095 2355,3095 2405,3045 2405,2990 2428.43,2966.57 Z2.C
  Bottom Layer w30: Z2.C 2482.6,2961.57 2482.6,2940.28 2482.8,2940.08 R23.2
NetOP1_4: OP1.4 R29.1 | length 353.6
  Bottom Layer w20: OP1.4 1570,3010 1579.97,3000.03 1600,2980 1600,2820 1585,2805 R29.1
NetQ3_1: Q3.1 R20.1 | length 79.6
  Bottom Layer w20: R20.1 1463.7,2633.7 1463.7,2702.83 Q3.1
NetQ3_3: Q3.3 R25.1 | length 77.6
  Bottom Layer w20: R25.1 1391.3,2631.3 1391.3,2705.24 Q3.3
NetR2_1: R2.1 R3.2 | length 265
  Bottom Layer w40: R2.1 R3.2
NetR3_1: R3.1 R4.2 | length 403.2
  Bottom Layer w40: R4.2 3240,1349.48 3240,1285 3295,1230 3484.48,1230 R3.1@3534.48,1180
NetR17_2: R17.2 R18.1 | length 109.2
  Bottom Layer w25: R18.1 2711,2756 2751.36,2756 2760,2764.64 R17.2
SF: IC1.9 R26.1 R28.1 | length 216.7
  Bottom Layer w20: IC1.9 1110,1951.81 1111.81,1950 R26.1 R28.1
VCC: C3.+ C17.2 D7.A IC1.12 R4.1 R5.2 R19.1 R25.2 R29.2 R31.2 R41.1 R41.2 Z1.K | length 6853.6
  Top Layer w20: 1360,2385 1500,2385
  Bottom Layer w20: R41.1@1370,2385 1370,2468.43 1395,2493.43 1395,2495 R19.1 1400,2559.29 1391.5,2567.8 R25.2
  Bottom Layer w25: R31.2@980,2812.2 980,2950 ; D7.A 1055,1500 1075,1520 1075,1740 960,1855 IC1.12 960,2060 935,2085 680,2085 615,2150 615,2865 655,2905 700,2905 745,2950 980,2950 ; R41.2@1500,2385 1500,2456.31 1539.44,2495.75 Z1.K ; C17.2@1939.33,2457.05 1937.76,2457.05 1914.8,2480 C3.+ ; R4.1 2745,1350 2595,1500 2595,2390 2360,2625 R5.2 1839.76,2619.76 1839.76,2560.16 1830,2550.4 C3.+ ; 980,2950 980,3060 1045,3125 1632.56,3125 1647.2,3110.36 R29.2 1647.2,2540.87 1614.16,2507.83 Z1.K ; Z1.K 1622.04,2487.87 1822.13,2487.87 C3.+

## Keep-outs
Keep-Out Layer:
  the board outline again, w10

## Other copper
Bottom Layer:
  region net NetBR1_+: 2410,525 2465,525 2560,620 2725,620 2745,640 2745,760 2720,785 2445,785 2380,720 2380,555
  region net +24: 3710,2915 3710,2800 3695,2785 3570,2785 3490,2705 3490,2435 3555,2370 4165,2370 4205,2330 4205,2045 4175,2015 3490,2015 3455,1980 3455,1900 3490,1865 4250,1865 4305,1920 4305,2500 4265,2540 3905,2540 3865,2500 3730,2500 3705,2525 3705,2645 3775,2715 3955,2715 3965,2725 3965,2805 3940,2830 3800,2830 3785,2845 3785,2950
  region net GND_S: 2955,1985 2955,2105 2980,2130 3245,2130 3365,2250 3410,2250 3480,2320 4120,2320 4150,2290 4150,2145 4115,2110 3470,2110 3380,2020 3380,1815 3415,1780 4210,1780 4210,1610 3355,1610 3220,1745 3220,1875 3185,1910 3080,1910 3080,1935 3035,1980
  region net NetDD1_1: 3065,2330 3385,2330 3430,2375 3430,2790 3500,2860 3665,2860 3675,2870 3675,2955 3640,2990 3395,2990 3285,2880 3285,2580 3170,2465 2995,2465 2995,2425
  region net NetDD1_3: 3035,2720 3195,2720 3225,2750 3225,2950 3325,3050 3770,3050 3810,3010 3810,2880 3825,2865 3940,2865 3980,2905 3980,3160 3970,3170 3140,3170 2965,2995 2965,2775 3005,2735
  region net AC_L: 4078,1175 4240,1175 4265,1150 4265,805 4230,770 4110,770 4060,820 4060,1130
  region net NetCX1_2: 3515,640 3520,635 4095,635 4150,690 4250,690 4275,665 4275,535 4230,490 3515,490 3480,525 3480,615
  region net AC_N: 3500,830 3865,830 3920,885 3920,1225 3980,1285 4210,1285 4265,1340 4265,1410 4245,1430 3895,1430 3745,1280 3745,1005 3690,950 3515,950 3495,930
  region net GND: 1375,1950 1410,1950 1410,1955 1440,1985 1540,1985 1560,2005 1560,2045 1665,2045 1670,2050 1720,2050 1740,2070 1845,2070 1870,2095 1870,2250 1890,2270 2075,2270 2105,2300 2335,2300 2360,2325 2360,2465 2340,2485 2030,2485 1995,2450 1995,2415 1990,2410 1730,2410 1710,2390 1710,2375 1700,2365 1560,2365 1550,2355 1550,2320 1540,2310 1465,2310 1430,2275 1430,2115 1365,2050 1365,1970
  region net NetC4_2: 1390,1590 1390,1505 1410,1485 1835,1485 1890,1540 1890,1705 1915,1730 1975,1730 2095,1850 2205,1850 2250,1895 2250,2075 2080,2075 2030,2025 2030,1915 1945,1830 1820,1830 1735,1745 1735,1650 1700,1615 1415,1615
  region net +310: 1625,665 1625,785 1650,810 2020,810 2085,745 2085,525 2180,430 2255,430 2275,450 2275,750 2340,815 2340,950 2315,975 1810,975 1755,920 1600,920 1550,870 1550,650 1575,650 1595,630
  region net GND: 2150,2485 2385,2485 2520,2350 2520,1360 2600,1280 2690,1280 2725,1245 2725,1145 2715,1135 2680,1135 2680,1140 2665,1155 2645,1135 2385,1135 2355,1105 2355,1070 2340,1055 2225,1055 2155,1125 1955,1125 1910,1170 1910,1230 2010,1230 2115,1335 2270,1335 2385,1450 2385,2250 2300,2335 2185,2335

## Silkscreen, mask and mechanical layers (free items; w line width, h text height)
Top Solder:
  region: 3035,2030 3285,2030 3330,1985 3330,1770 3370,1730 4145.67,1730 4147.53,1728.15 4145,1725.62 4145,1670 4080,1670 4070,1660 3360,1660 3270,1750 3270,1895 3185,1980 3055,1980
  region: 3740,2880 3735,2875 3735,2780 3695,2740 3605,2740 3535,2670 3535,2450 3580,2405 4200,2405 4250,2355 4250,2040 4170,1960 4170,1935 4190,1935 4225,1900 4270,1945 4275,1945 4275,2445 4215,2505 3620,2505 3605,2520 3605,2660 3640,2695 3705,2695 3770,2760 3770,2930
  region: 3115,2425 3125,2435 3230,2435 3325,2530 3325,2885 3410,2970 3620,2970 3645,2945 3645,2910 3630,2895 3460,2895 3395,2830 3395,2445 3335,2385 3050,2385
  region: 3045,2830 3030,2845 3030,3015 3160,3145 3925,3145 3940,3130 3940,3050 3925,3035 3860,3035 3810,3085 3240,3085 3170,3015 3170,2810 3155,2795

## Text inside footprints (layer, text, board x,y; h text height)
C6: Top Overlay "-" at 3591.29,1589.18 h60 r270; Top Overlay "-" at 3634.89,2079.16 h60 r270; Top Overlay "-" at 3644.81,2029.22 h60
C7: Top Overlay "-" at 3591.29,2129.18 h60 r270; Top Overlay "-" at 3634.89,2619.16 h60 r270; Top Overlay "-" at 3644.81,2569.22 h60
C8: Top Overlay "-" at 4111.68,2128.79 h60 r270; Top Overlay "-" at 4155.28,2618.77 h60 r270; Top Overlay "-" at 4165.2,2568.82 h60